# Altium PCB PCB1.PcbDoc (part 1 of 2)
Units mm, origin at the board's own origin, x right, y up, seen from the top; angles counter-clockwise.
Board outline 53 x 53 mm, 4 copper layers (Top Layer, Internal Plane 1, Signal Layer 1, Bottom Layer), stack 1.58 mm thick; 86 components, 52 nets, 310 pads, 1237 vias.
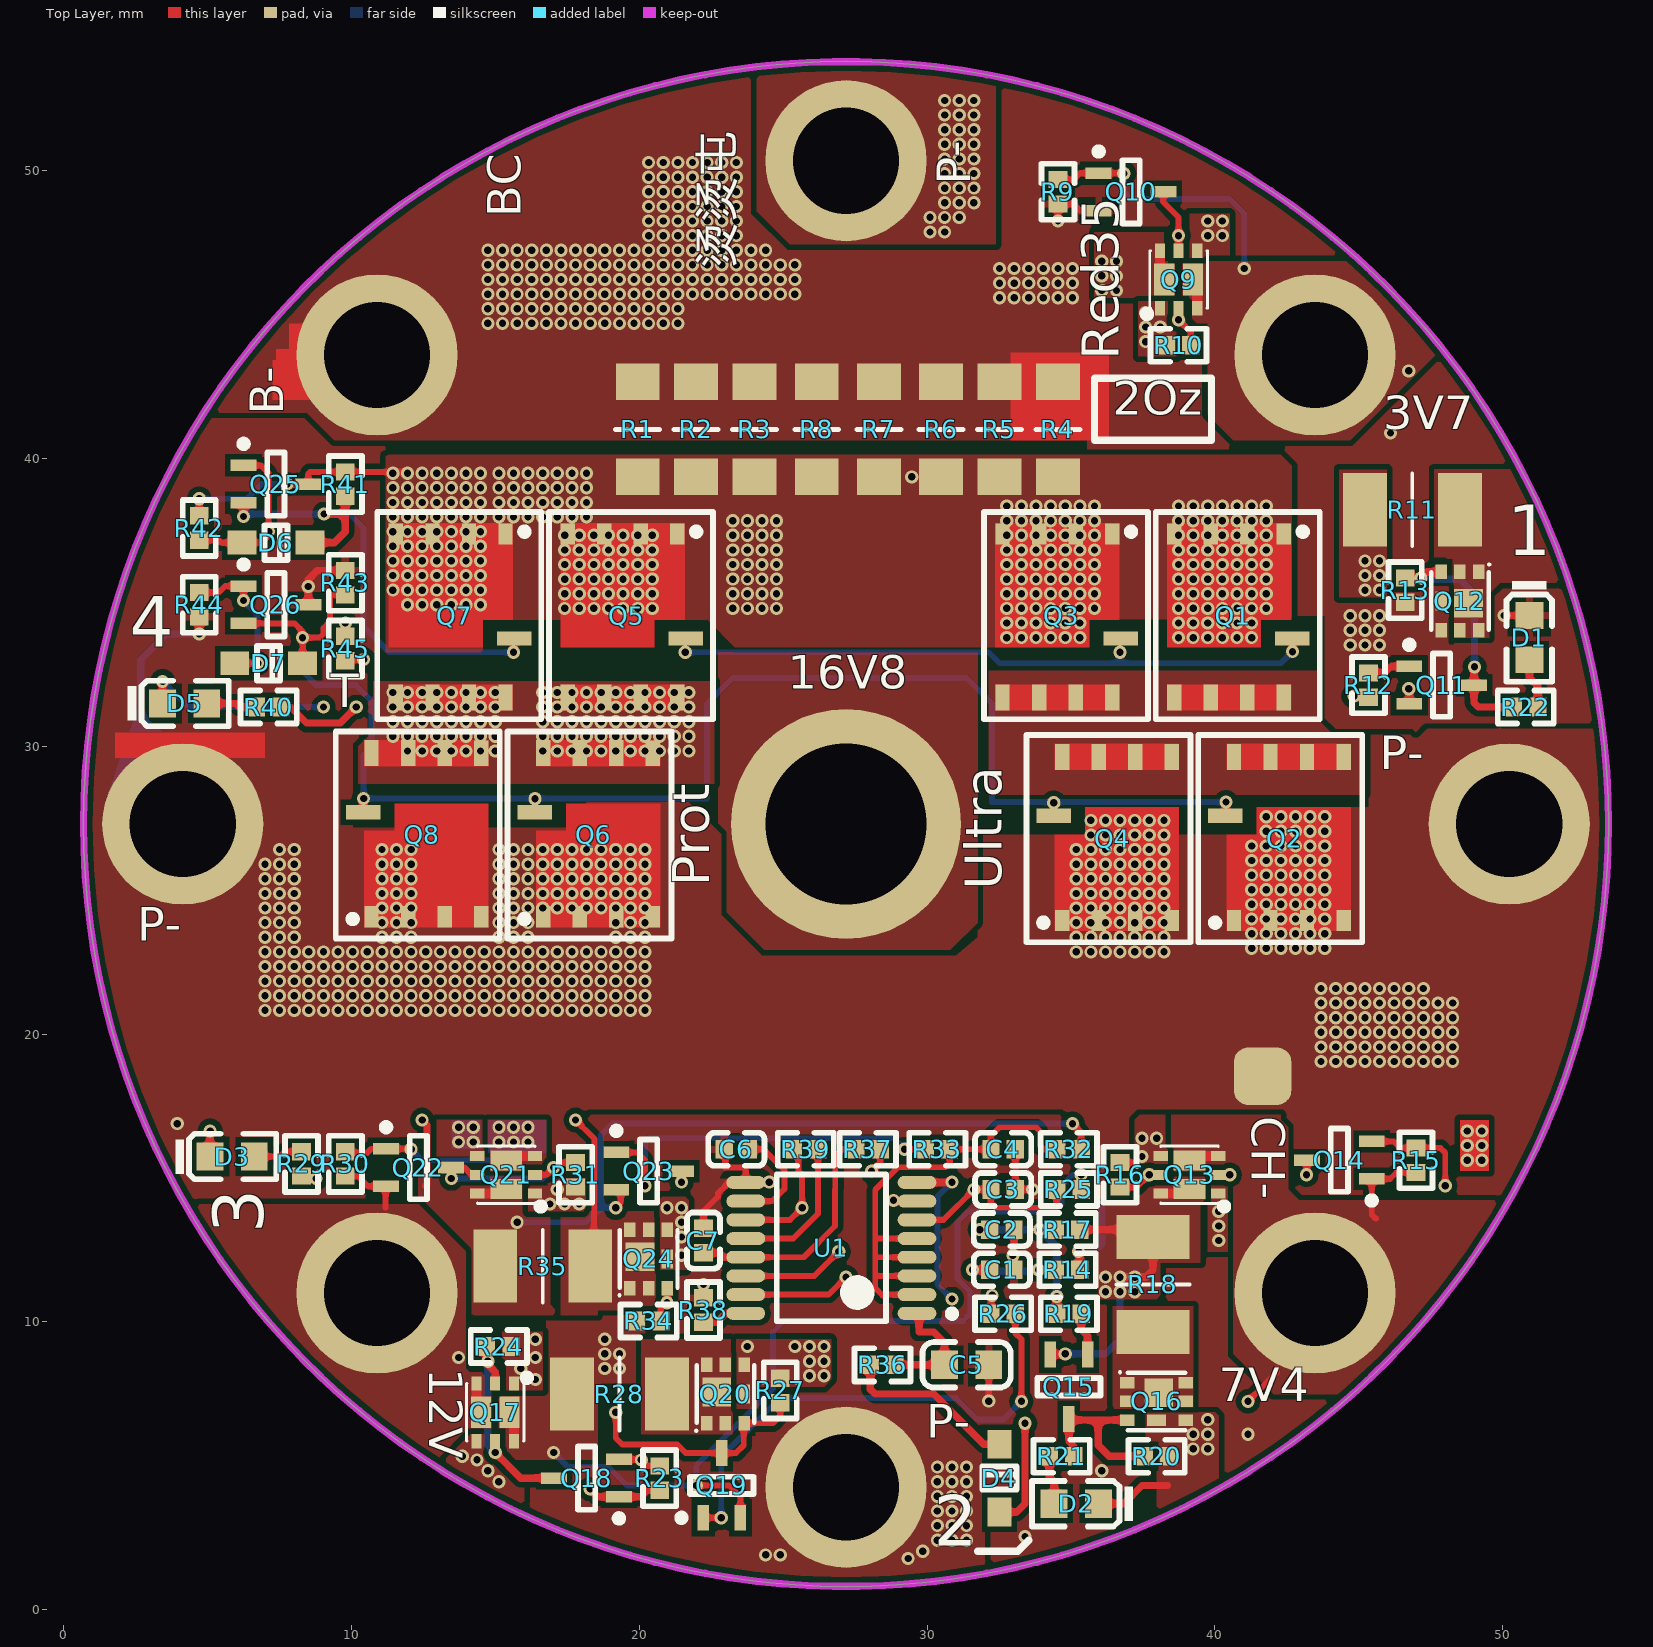
[diagram p0: Top Layer view]
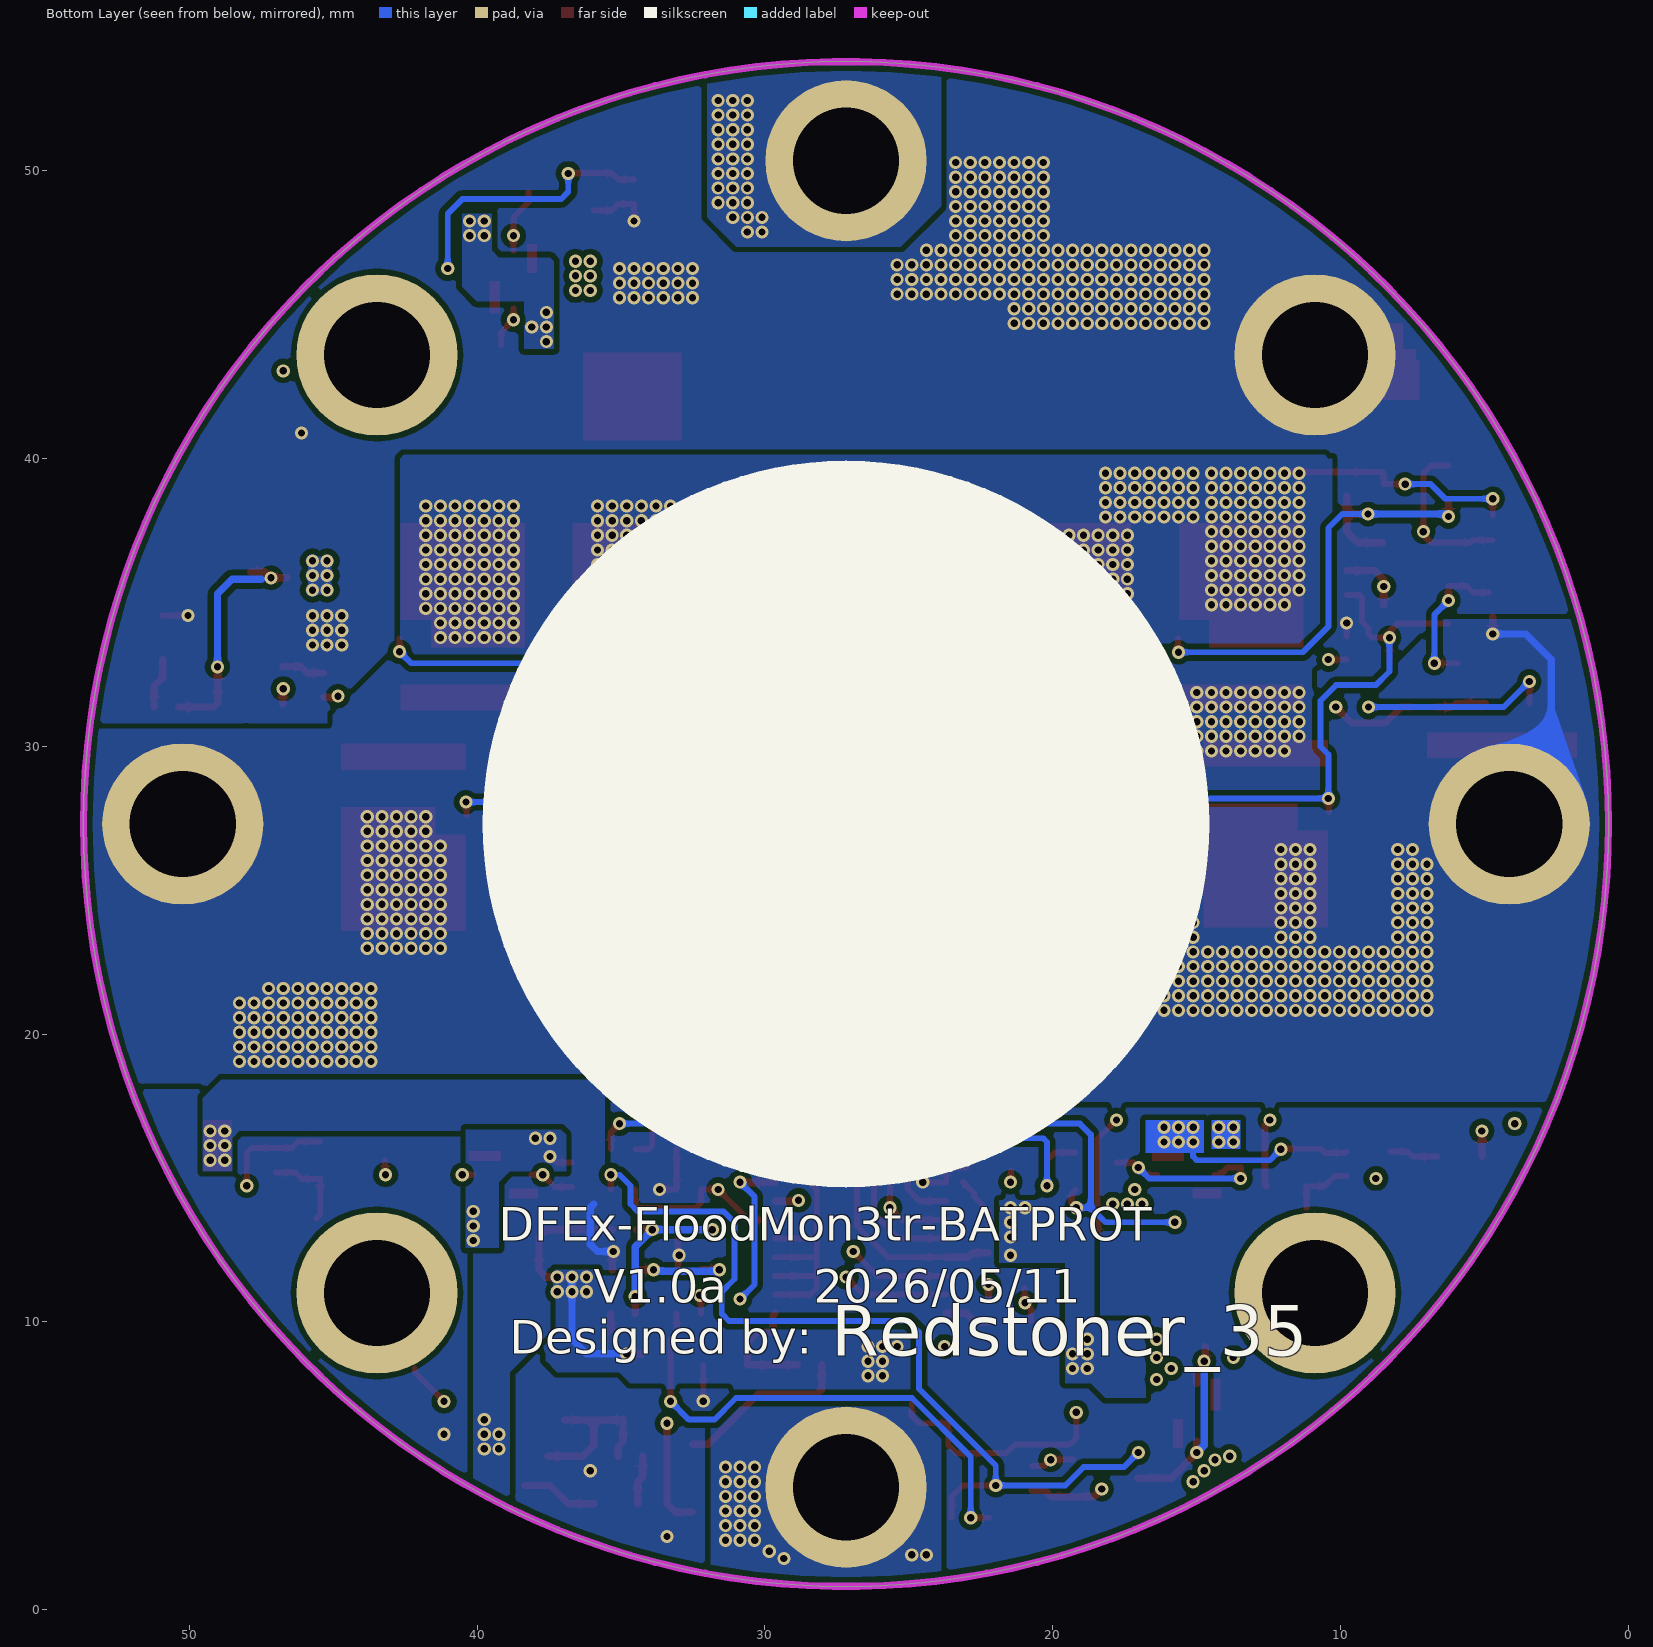
[diagram p1: Bottom Layer view, seen from below]
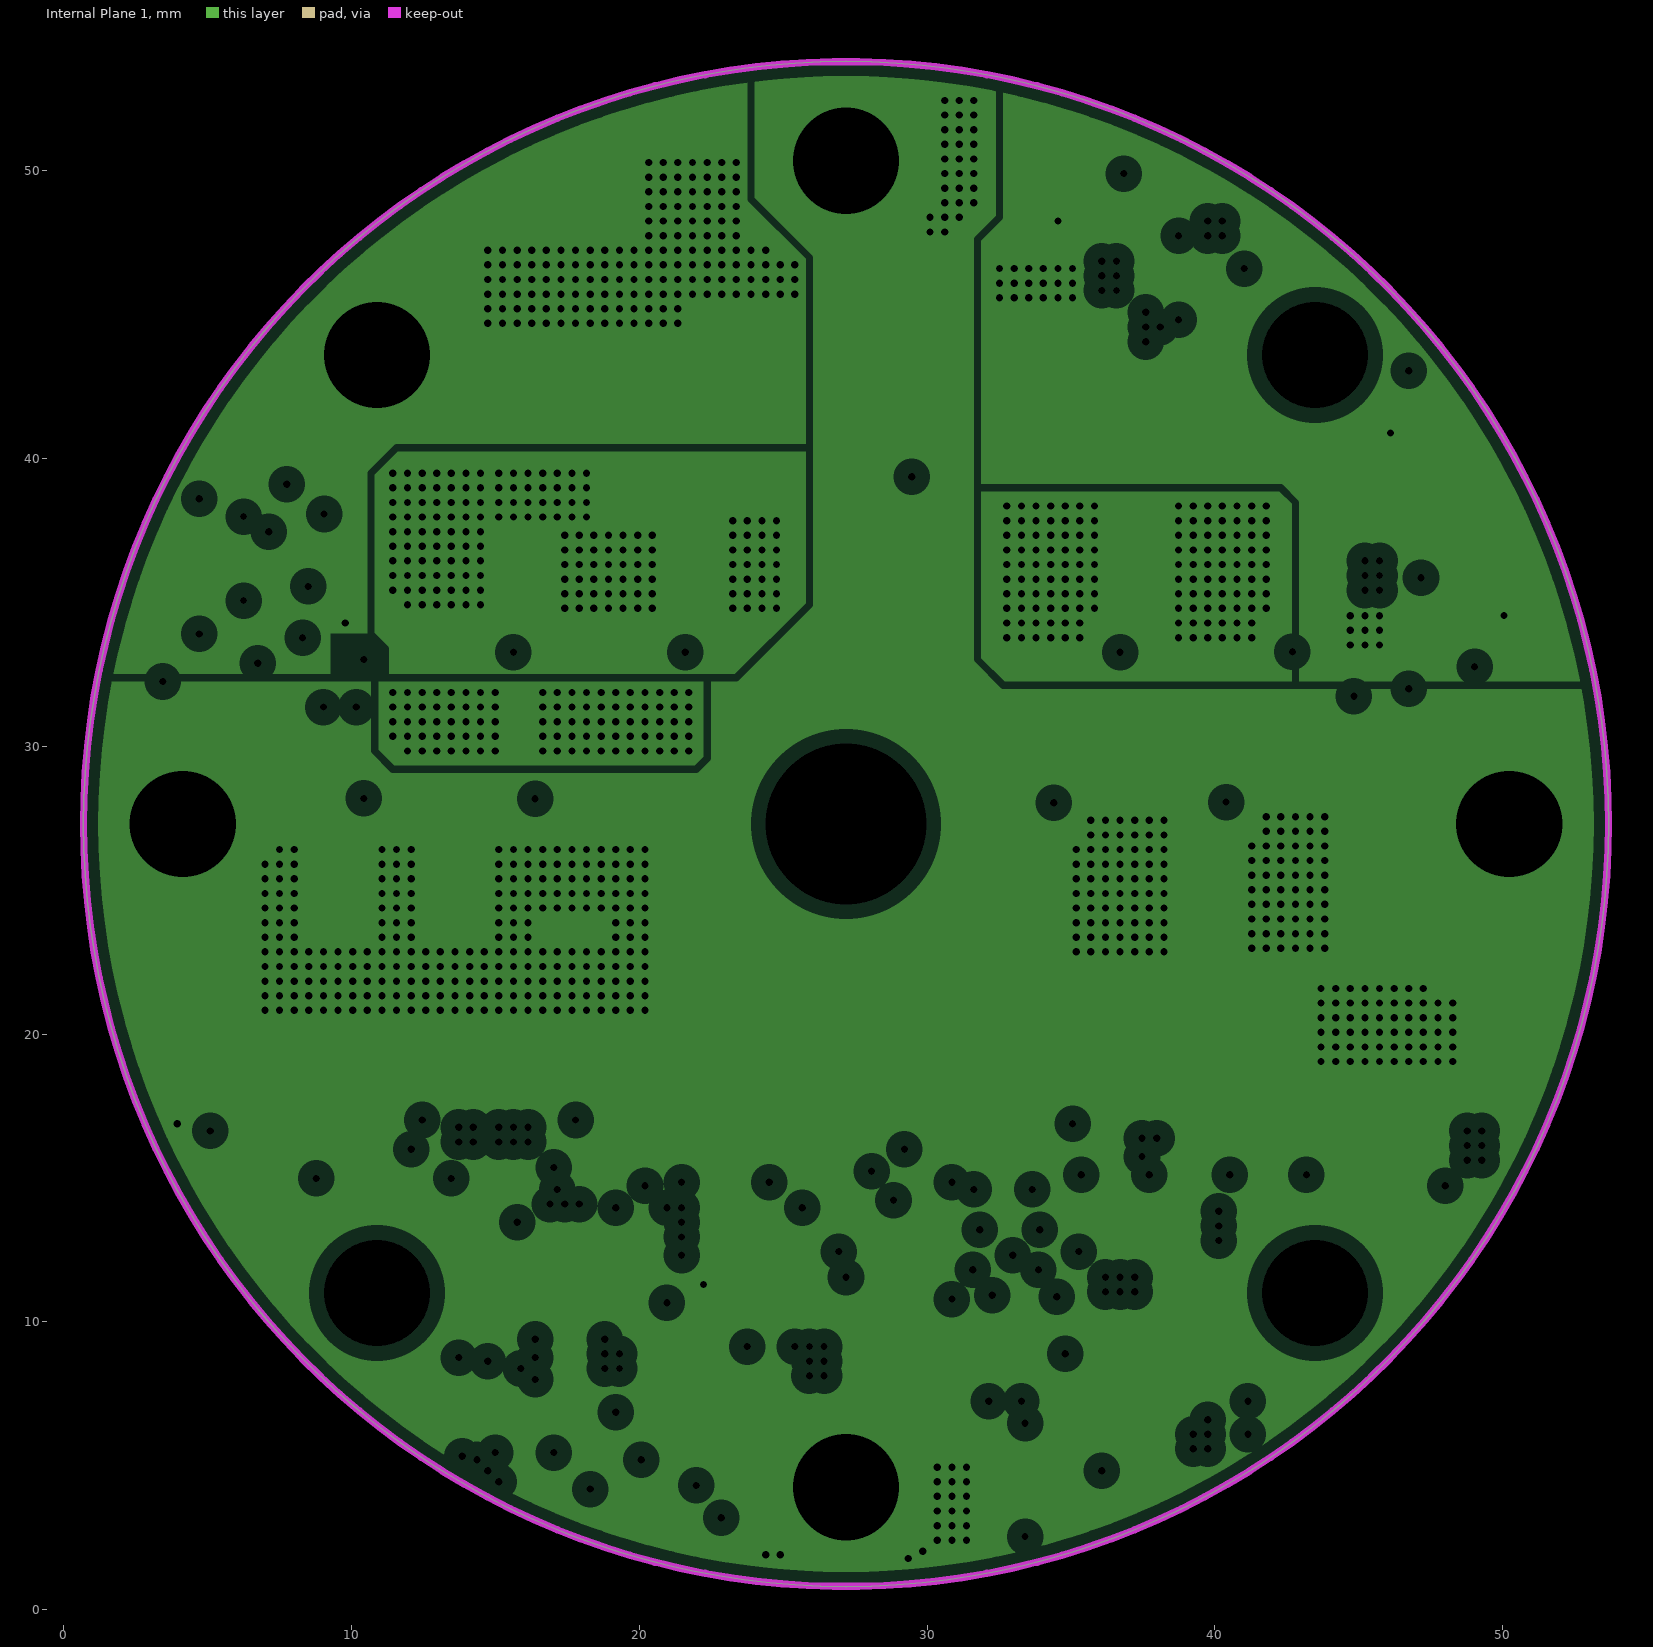
[diagram p2: Internal Plane 1, clearances drawn from the general rule]
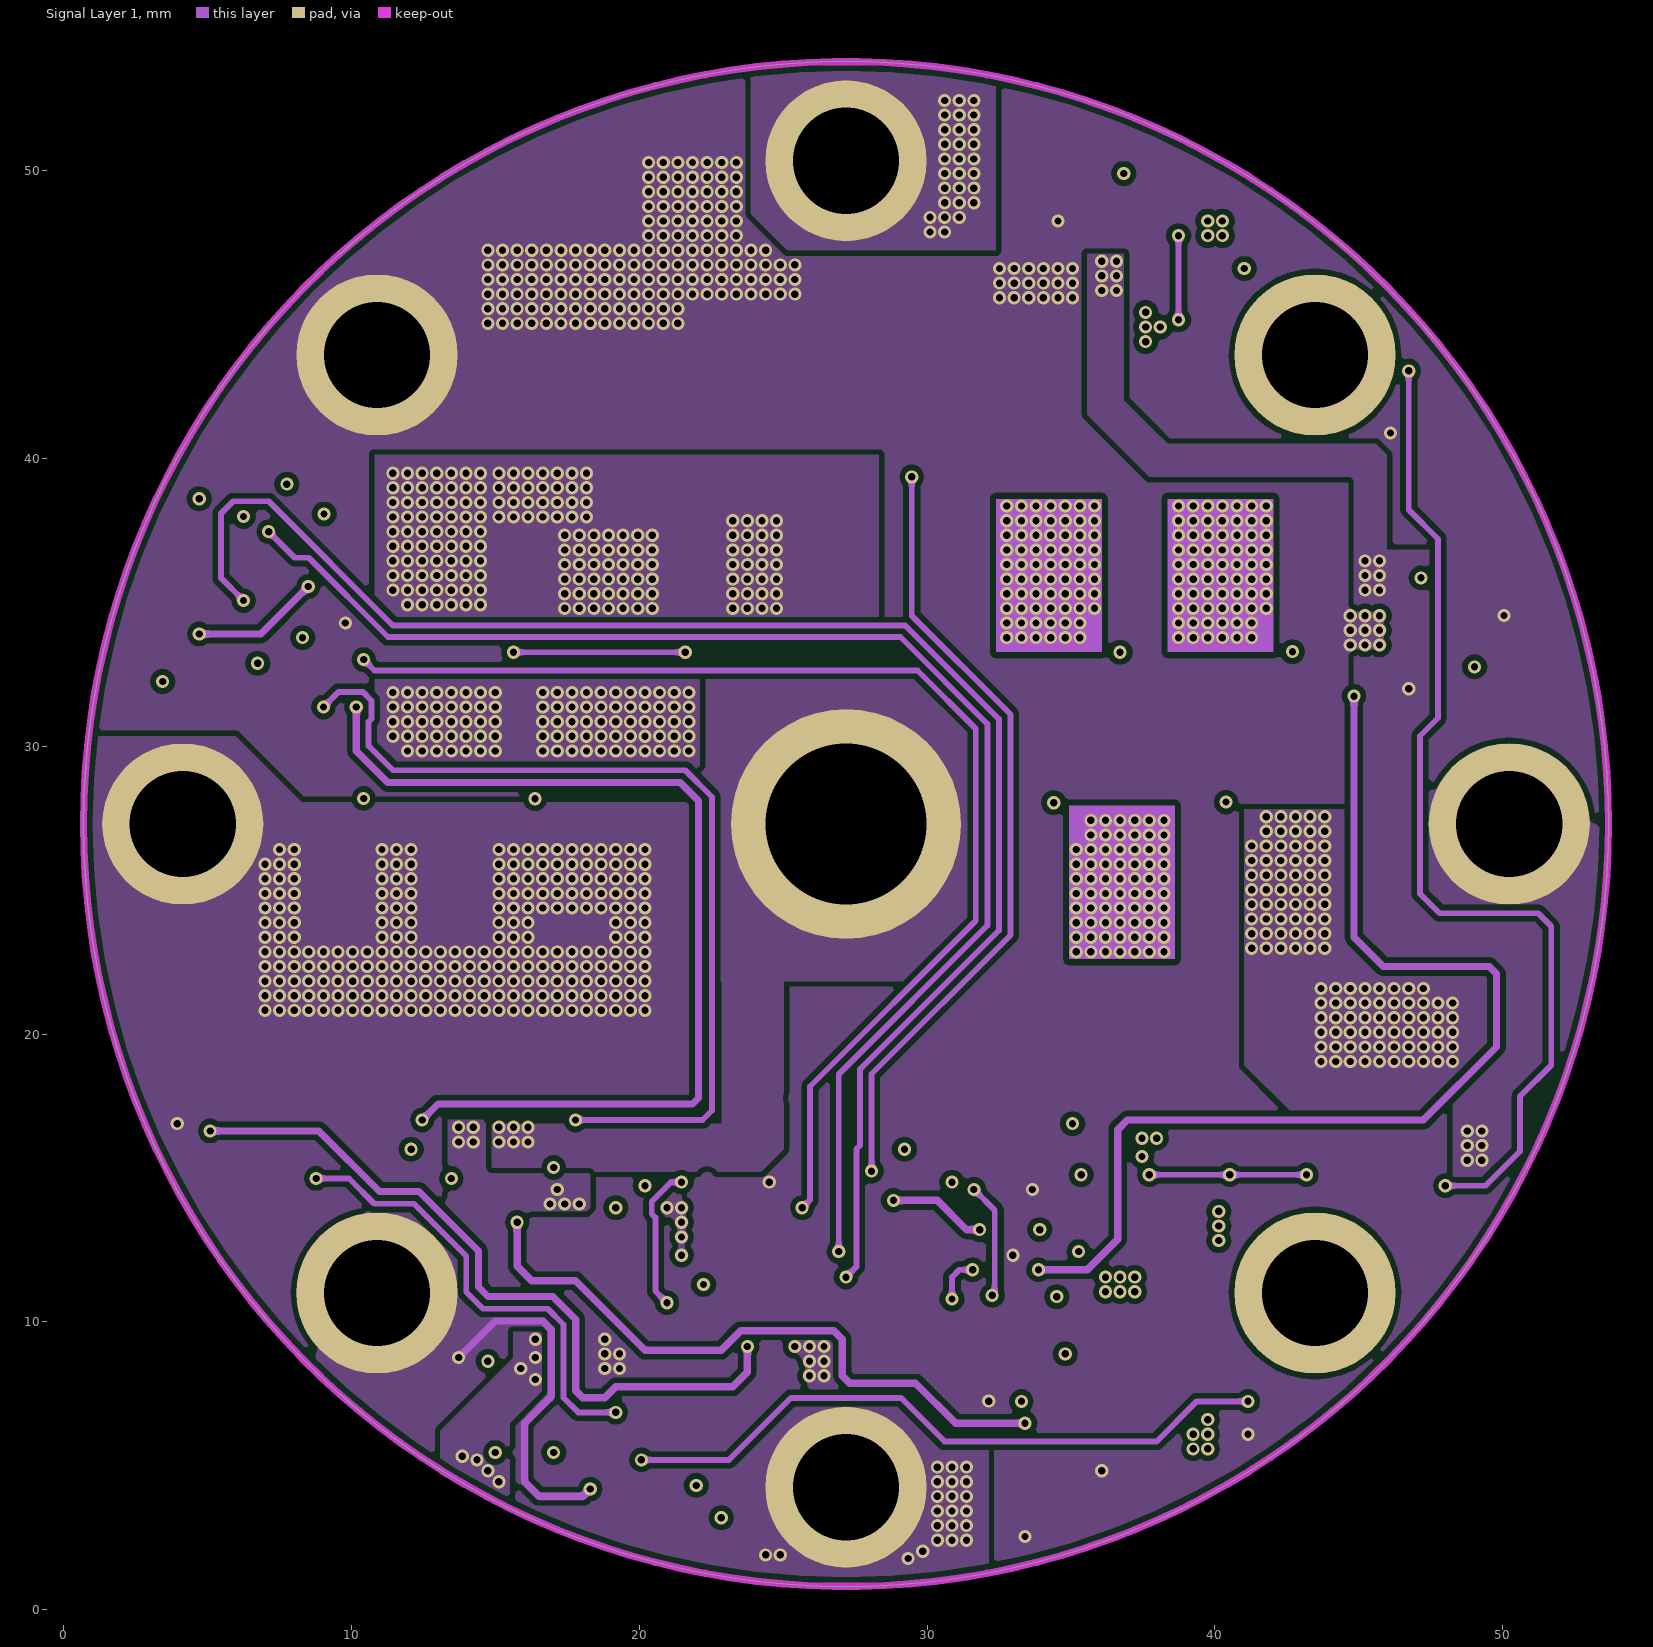
[diagram p3: Signal Layer 1]
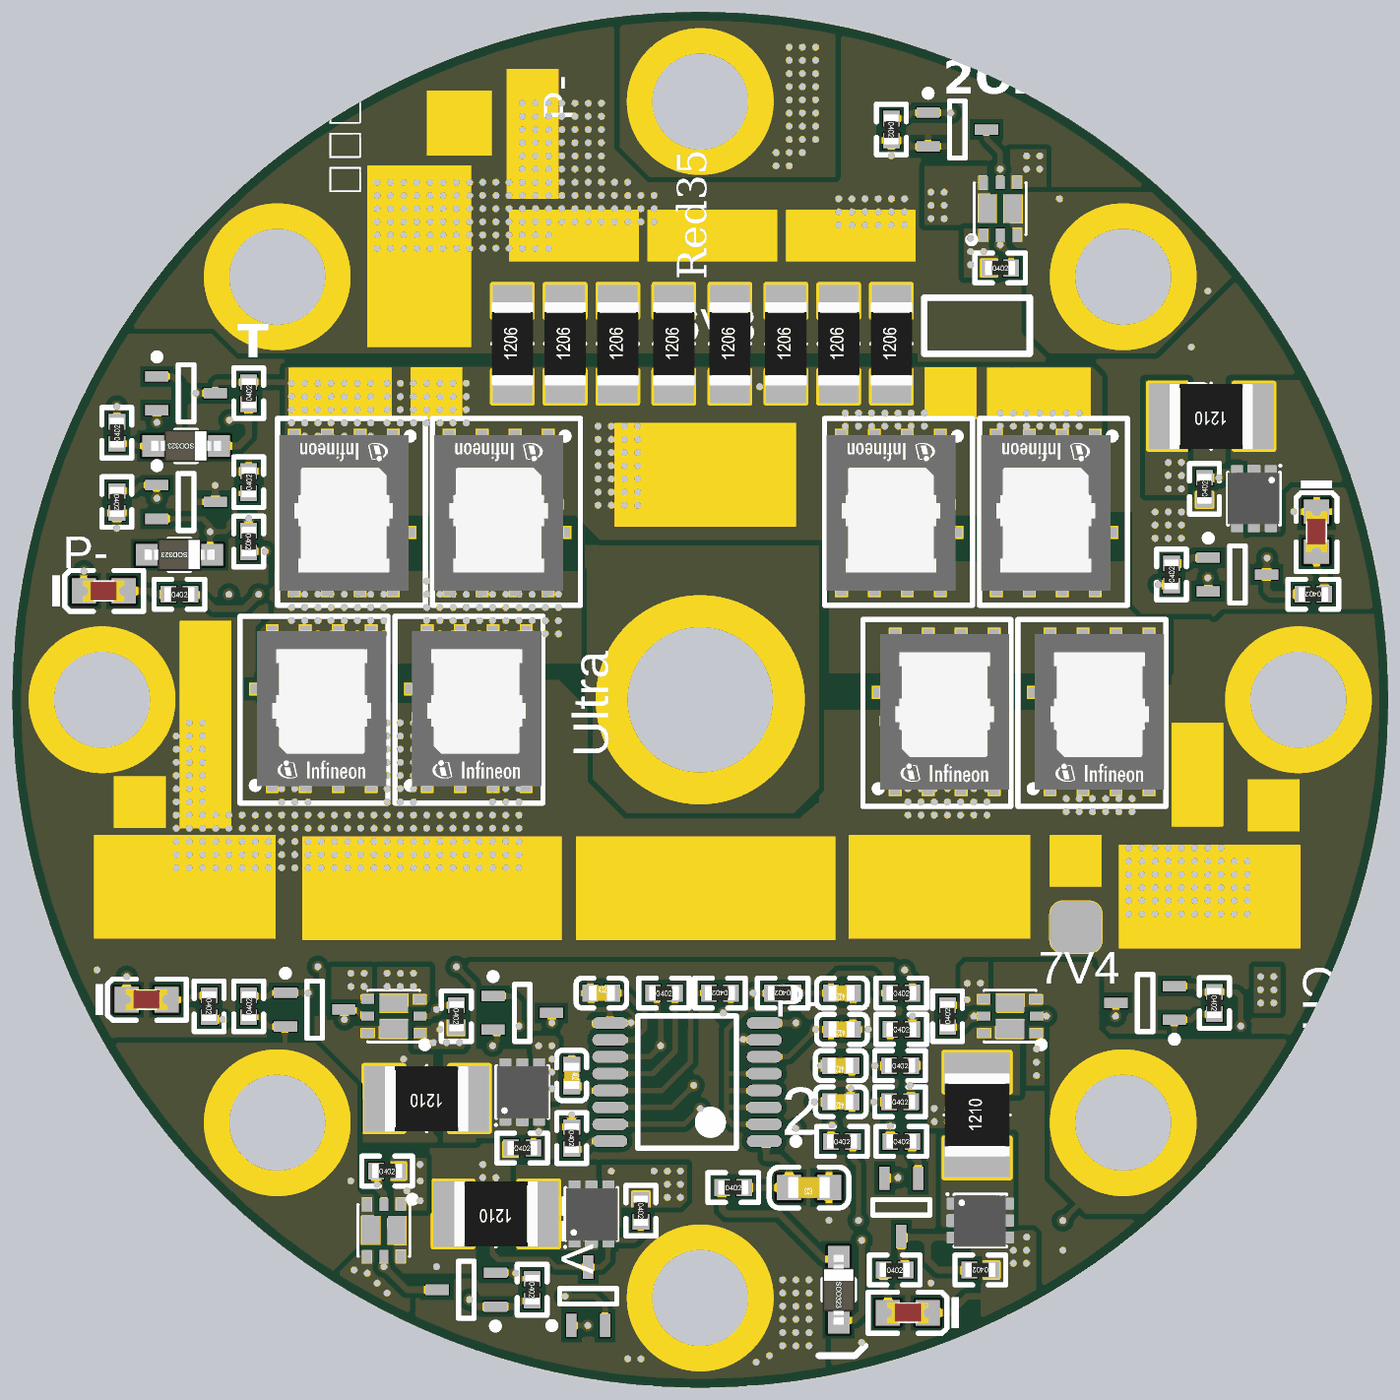
[diagram p5: 3D render of the assembled board from above, using the file's embedded part models]

## Layer stack, top to bottom
Top Solder: solder mask 0.0102, Solder Resist, Dk 3.5
Top Layer: signal copper 0.0356
Dielectric 1: core 0.656, FR-4, Dk 4.2
Internal Plane 1: plane copper 0.036
Dielectric 3: prepreg 0.127, Dk 4.2
Signal Layer 1: signal copper 0.036
Dielectric 2: core 0.654, Dk 4.2
Bottom Layer: signal copper 0.0356
Bottom Solder: solder mask 0.0102, Solder Resist, Dk 3.5

## Board outline
0.678,27.305 ccw(c27.178,27.305) 27.178,0.805 ccw(c27.178,27.305) 53.678,27.305 ccw(c27.178,27.305) 27.178,53.805 ccw(c27.178,27.305)

## Design rules (kind name [scope] priority, off if disabled: settings)
Clearance [All] p1: gap=0.198
PlaneClearance [All] p1: clearance=0.508
PlaneConnect [All] p1: planeconnectstyle=Direct reliefexpansion=0.508 reliefentries=4 reliefconductorwidth=0.254 reliefairgap=0.254
PolygonConnect PolygonConnect_1 [IsVia] p1: connectstyle=Direct reliefconductorwidth=0.254 reliefentries=4 polygonreliefangle="90 Angle" airgapwidth=0.254
PolygonConnect [All] p2: connectstyle=Direct reliefconductorwidth=0.254 reliefentries=4 polygonreliefangle="90 Angle" airgapwidth=0.254
RoomDefinition main [InComponentClass('main')] p1: confinementstyle=ConfineIn formatcopy=TRUE lockcomponents=FALSE outline 55.372,-0.762 129.286,-0.762 129.286,7.874 55.372,7.874
RoutingVias [All] p1: holewidth=0.711 width=1.27 viastyle="Through Hole" minholewidth=0.711 minwidth=1.27 maxholewidth=0.711 maxwidth=1.27
SolderMaskExpansion [All] p1: expansion=0.102
Width [All] p1: maxlimit=25.4 minlimit=0.178 preferedwidth=0.254
28 further rules are at their usual default settings.

## Components (designator, comment, footprint, x,y, rotation, side; value= is the part's Value field where it differs from the comment)
C1 "100nF (104) 10% 50V" 0402_C 32.595,11.811 r180 top
C2 "100nF (104) 10% 50V" 0402_C 32.595,13.208 r180 top
C3 "100nF (104) 10% 50V" 0402_C 32.639,14.605 r180 top
C4 "100nF (104) 10% 50V" 0402_C 32.639,16.002 r180 top
C5 "GRM188R61E106KA73D" 0603_C 31.369,8.509 r180 top
C6 "33nF (333) 10% 50V" 0402_C 23.368,16.002 r0 top
C7 "100nF (104) 10% 50V" 0402_C 22.225,12.827 r270 top
D1 "白灯 0603" 0603_LED_S1 50.927,33.782 r270 top
D2 "白灯 0603" 0603_LED_S1 35.179,3.683 r180 top
D3 "白灯 0603" 0603_LED_S1 5.842,15.748 r0 top
D4 "B5819WS S4" SOD-323 32.512,4.572 r270 top
D5 "白灯 0603" 0603_LED_S1 4.191,31.496 r0 top
D6 "B5819WS S4" SOD-323 7.366,37.084 r180 top
D7 "B5819WS S4" SOD-323 7.112,32.893 r180 top
Q1 "IQDH29NE2LM5CG" IFX-PG-WHTFN-9-2-V 40.64,34.544 r270 top
Q2 "IQDH29NE2LM5CG" IFX-PG-WHTFN-9-2-V 42.418,26.797 r90 top
Q3 "IQDH29NE2LM5CG" IFX-PG-WHTFN-9-2-V 34.671,34.544 r270 top
Q4 "IQDH29NE2LM5CG" IFX-PG-WHTFN-9-2-V 36.449,26.797 r90 top
Q5 "IQDH29NE2LM5CG" IFX-PG-WHTFN-9-2-V 19.558,34.544 r270 top
Q6 "IQDH29NE2LM5CG" IFX-PG-WHTFN-9-2-V 18.415,26.924 r90 top
Q7 "IQDH29NE2LM5CG" IFX-PG-WHTFN-9-2-V 13.589,34.544 r270 top
Q8 "IQDH29NE2LM5CG" IFX-PG-WHTFN-9-2-V 12.446,26.924 r90 top
Q9 "WSD4280DN22" UDFN-6_L2.0-W2.0-P0.65-BL_NTLUD3A50PZ 38.735,46.228 r0 top
Q10 "2N7002KW" SC70-3 37.084,49.276 r0 top
Q11 "SS8550 Y2" SC70-3 47.879,32.131 r0 top
Q12 "AON2408" PDFN-6_L2.0-W2.0-P0.65-BL-EP 48.514,35.052 r180 top
Q13 "WSD4280DN22" UDFN-6_L2.0-W2.0-P0.65-BL_NTLUD3A50PZ 39.116,15.113 r90 top
Q14 "2N7002KW" SC70-3 44.323,15.621 r180 top
Q15 "SS8550 Y2" SC70-3 34.925,7.747 r270 top locked
Q16 "AON2408" PDFN-6_L2.0-W2.0-P0.65-BL-EP 37.973,7.239 r270 top
Q17 "WSD4280DN22" UDFN-6_L2.0-W2.0-P0.65-BL_NTLUD3A50PZ 14.986,6.858 r180 top
Q18 "2N7002KW" SC70-3 18.161,4.572 r180 top
Q19 "SS8550 Y2" SC70-3 22.86,4.318 r90 top
Q20 "AON2408" PDFN-6_L2.0-W2.0-P0.65-BL-EP 22.987,7.493 r0 top
Q21 "WSD4280DN22" UDFN-6_L2.0-W2.0-P0.65-BL_NTLUD3A50PZ 15.367,15.113 r90 top
Q22 "2N7002KW" SC70-3 12.319,15.367 r0 top
Q23 "SS8550 Y2" SC70-3 20.32,15.24 r0 top
Q24 "AON2408" PDFN-6_L2.0-W2.0-P0.65-BL-EP 20.32,12.192 r0 top
Q25 "BSS84AKW" SC70-3 7.366,39.116 r0 top
Q26 "BSS84AKW" SC70-3 7.366,34.925 r0 top
R1 "JER1206F1R004" 1206R 19.939,41.021 r90 top
R2 "JER1206F1R004" 1206R 21.971,41.021 r90 top
R3 "JER1206F1R003" 1206R 24.003,41.021 r90 top
R4 "JER1206F1R003" 1206R 34.544,41.021 r90 top
R5 "JER1206F1R003" 1206R 32.512,41.021 r90 top
R6 "JER1206F1R003" 1206R 30.48,41.021 r90 top
R7 "1206 2.5mΩ ±1% 1W" 1206R 28.321,41.021 r90 top
R8 "1206 2.5mΩ ±1% 1W" 1206R 26.162,41.021 r90 top
R9 "510KΩ (5103) ±1%" 0402_R 34.544,49.276 r270 top
R10 "510KΩ (5103) ±1%" 0402_R 38.735,43.942 r0 top
R11 "43Ω" 1210R 46.863,38.227 r180 top
R12 "220Ω (2200) ±1%" 0402_R 45.339,32.131 r90 top
R13 "680Ω (6800) ±1%" 0402_R 46.609,35.433 r90 top
R14 "1KΩ (1001) ±1%" 0402_R 34.881,11.811 r0 top
R15 "510KΩ (5103) ±1%" 0402_R 46.99,15.621 r270 top
R16 "510KΩ (5103) ±1%" 0402_R 36.703,15.113 r90 top
R17 "1KΩ (1001) ±1%" 0402_R 34.881,13.208 r0 top
R18 "43Ω" 1210R 37.846,11.303 r90 top
R19 "220Ω (2200) ±1%" 0402_R 34.925,10.287 r0 top
R20 "680Ω (6800) ±1%" 0402_R 37.973,5.334 r180 top
R21 "2KΩ (2001) ±1%" 0402_R 34.671,5.334 r0 top
R22 "2KΩ (2001) ±1%" 0402_R 50.8,31.369 r180 top
R23 "510KΩ (5103) ±1%" 0402_R 20.701,4.572 r270 top
R24 "510KΩ (5103) ±1%" 0402_R 15.113,9.144 r0 top
R25 "1KΩ (1001) ±1%" 0402_R 34.925,14.605 r0 top
R26 "220Ω (2200) ±1%" 0402_R 32.639,10.287 r0 top
R27 "680Ω (6800) ±1%" 0402_R 24.892,7.62 r270 top
R28 "43Ω" 1210R 19.304,7.493 r180 top
R29 "2KΩ (2001) ±1%" 0402_R 8.255,15.494 r270 top
R30 "510KΩ (5103) ±1%" 0402_R 9.779,15.494 r90 top
R31 "510KΩ (5103) ±1%" 0402_R 17.78,15.113 r270 top
R32 "1KΩ (1001) ±1%" 0402_R 34.925,16.002 r0 top
R33 "220Ω (2200) ±1%" 0402_R 30.353,16.002 r180 top
R34 "680Ω (6800) ±1%" 0402_R 20.32,10.033 r0 top
R35 "43Ω" 1210R 16.637,11.938 r180 top
R36 "1KΩ (1001) ±1%" 0402_R 28.448,8.509 r0 top
R37 "2KΩ (2001) ±1%" 0402_R 27.94,16.002 r180 top
R38 "20KΩ (2002) ±1%" 0402_R 22.225,10.414 r270 top
R39 "91KΩ (9103) ±1%" 0402_R 25.781,16.002 r0 top
R40 "2KΩ (2001) ±1%" 0402_R 7.112,31.369 r0 top
R41 "5.6MΩ (5604) ±1%" 0402_R 9.779,39.116 r90 top
R42 "5.6MΩ (5604) ±1%" 0402_R 4.699,37.592 r90 top
R43 "5.6MΩ (5604) ±1%" 0402_R 9.779,35.687 r90 top
R44 "5.6MΩ (5604) ±1%" 0402_R 4.699,34.925 r270 top
R45 "SDNT1005X104F3950FTF" 0402_R 9.779,33.401 r270 top
U1 "CM1341-FKT" TSSOP16-CM1341 26.67,12.573 r180 top locked

## Footprints (in the part's own frame and the unit in brackets; to place one, negate y for a bottom-side part, rotate by r counter-clockwise, add the part's x,y. Pads: shape width x height; smd on the part's side, far side on the other; paste and mask are expansions set on the pad)
0402_C [mm]
  rect 0.6x0.65 smd mask+0.051: 1(-0.425,0) 2(0.425,0)
  silkscreen extent -0.97,-0.58 0.97,0.58, body extent -0.48,-0.3 0.52,0.3, height 0.2
0402_R [mm]
  rect 0.6x0.65 smd mask+0.051: 1(-0.425,0) 2(0.425,0)
  silkscreen extent -0.97,-0.58 0.97,0.58, body extent -0.57,-0.27 0.58,0.28, height 0.41
0603_C [mm]
  rect 0.93x0.98 smd: 1(-0.77,0) 2(0.77,0)
  silkscreen extent -1.53,-0.79 1.54,0.79, body extent -0.8,-0.4 0.8,0.4, height 0.3
0603_LED_S1 [mm]
  rect 0.93x0.98 smd: A(0.77,0) K(-0.77,0)
  silkscreen extent -1.98,-0.79 1.54,0.79, body extent -0.8,-0.4 0.8,0.4, height 0.6
1206R [mil]
  rect 50x60 smd: 1(-65,0) 2(65,0)
  silkscreen extent 0,-30 0,30, body extent -63,-31 63,31, height 24
1210R [mil]
  rect 60x100 smd: 1(-65,0) 2(65,0)
  silkscreen extent 0,-50 0,50, body extent -63,-49 63,49, height 24
IFX-PG-WHTFN-9-2-V [mm] "PG-WHTFN-9-2, SMD, 1.27 mm pitch, 9 pin, 6.00 mm L X 5.00 W mm X 0.75 mm H body"
  rect 0.732x0.5 smd paste-0.25 mask-0.25: 1(-2.842,1.757) 2(-2.842,0.487) 3(-2.842,-0.783) 4(-2.842,-2.053)
  rect 0.9x0.5 smd paste-0.25 mask-0.25: 5(2.842,-2.053) 6(2.842,-0.783) 7(2.842,0.487) 8(2.842,1.757)
  rect 0.5x1.2 smd paste-0.05 mask+0: 9(0.792,2.053)
  Top Layer region: 1.092,-2.302 -3.208,-2.302 -3.208,-1.802 -3.208,-1.032 -3.208,-0.532 -3.208,0.238 -3.208,0.738 -3.208,1.508 -3.208,2.008 0.142,2.008 0.142,0.958 1.092,0.958
  Top Layer region: 3.292,2.008 3.292,-2.302 2.392,-2.302 2.392,2.008 3.292,2.008
  silkscreen extent -3.6,-2.7 3.6,3, body extent -2.96,-2.65 3.04,2.35, height 0.75
PDFN-6_L2.0-W2.0-P0.65-BL-EP [mm]
  rect 0.4x0.5 smd paste+0.03 mask+0.03: D(-0.65,1.016) D(-0.65,-1.016) D(0,1.016) G(0.65,-1.016) S(0.65,1.016)
  rect 1x1 smd paste+0.051 mask+0.03: D(-0.302,0.073)
  rect 0.4x0.5 smd paste+0.051 mask+0.03: D(0,-1.016)
  rect 0.4x0.66 smd paste+0.051 mask+0.03: S(0.65,0)
  silkscreen extent -1.02,-1.27 1,1, body extent -0.98,-1.02 1.02,0.98, height 0.6
SC70-3 [mm] "3 Lead SC70(SOT-323) package for small Transistor"
  rect 0.9x0.4 smd mask+0.05: 1(-1.125,0.65) 2(-1.125,-0.65) 3(1.125,0)
  silkscreen extent -1.25,-1.1 0.3,1.52, body extent -0.67,-1.1 0.67,1.1, height 1.1
SOD-323 [mm]
  rect 1x0.83 smd: 1(1.18,0) 2(-1.18,0)
  silkscreen extent -0.4,-0.6 0.4,0.6, body extent -1.35,-0.62 1.35,0.63, height 1.1
TSSOP16-CM1341 [mm] "TSOP, 16-Leads, Body 5.00x4.40mm, Pitch 0.65mm, IPC Medium Density"
  oval 1.35x0.45 smd mask+0.03: 1(-2.975,2.275) 2(-2.975,1.625) 3(-2.975,0.975) 4(-2.975,0.325) 5(-2.975,-0.325) 6(-2.975,-0.975) 7(-2.975,-1.625) 8(-2.975,-2.275) 9(2.975,-2.275) 10(2.975,-1.625) 11(2.975,-0.975) 12(2.975,-0.325) 13(2.975,0.325) 14(2.975,0.975) 15(2.975,1.625) 16(2.975,2.275)
  silkscreen extent -4.32,-2.55 1.9,2.55, body extent -2.3,-2.55 2.3,2.55, height 1.2
UDFN-6_L2.0-W2.0-P0.65-BL_NTLUD3A50PZ [mm]
  rect 0.35x0.495 smd mask+0.03: 1(-0.65,-1.001) 2(0,-1.001) 3(0.65,-1.001) 4(0.65,1.001) 5(0,1.001) 6(-0.65,1.001)
  rect 0.7x1.1 smd mask+0.03: 3(0.498,0) 6(-0.498,0)
  Top Layer region: 0.475,-1.174 0.826,-1.174 0.826,-0.06 0.475,-0.06
  Top Layer region: -0.826,0.226 -0.476,0.226 -0.476,1.239 -0.826,1.239
  silkscreen extent -1.22,-1.32 1,1, body extent -1.02,-1.02 1.02,1.02, height 0.55

## Part data
C1 C2 C3 C4: library part "0402 220nF (224) 10% 16V", "贴片电容"
C5: library part "0603 10uF (106) 10% 10V", "0603贴片MLCC电容 10uF ±20% 25V X5R"
C6 C7: library part "0402 100nF (104) 10% 16V", "贴片电容"
D1 D2 D3 D5: library part "0603 白灯", "发光二极管"
D4 D6 D7: library part "SOD-323 1N4148WS T4", "二极管"
Q1 Q2 Q3 Q4 Q5 Q6 Q7 Q8: library part IQDH29NE2LM5CGSC, "英飞凌MOSFET 25V 789A 0.2mΩ @ 10V WHTFN-9(PDFN5x6源极底置)封装"
Q9 Q13 Q17 Q21: library part NTLUD3A50PZ, "内置肖特基二极管的双P沟道MOS -15V -4.6A 45mΩ @ 4.5V DFN2x2封装"
Q10 Q14 Q18 Q22: library part "2N7002 7002", "单N沟道MOSFET(场效应管)"
Q11 Q15 Q19 Q23: library part "SOT-23 SS8550 Y2", "PNP三极管，SOT-323 封装"
Q12 Q16 Q20 Q24: library part "AO3400A N道沟 X0YV1T SOT-23", "MOS(场效应管)"
Q25 Q26: library part SI2301CDS-T1-GE3, "单P沟道小信号MOSFET(场效应管)"
R1 R2: library part Res, "贴片合金电流检测电阻 1206封装 4mΩ ±1% 1W"
R3 R4 R5 R6: library part Res, "贴片合金电流检测电阻 1206封装 3mΩ ±1% 1W"
R7 R8: library part Res, "贴片合金检流电阻 1206 2.5mΩ ±1% 1W"
R9 R10 R15 R16 R23 R24 R30 R31: library part "0402 510KΩ (5103) 1%", "贴片电阻"
R11 R18 R28 R35: library part Res, "Resistor"
R12 R19 R26 R33: library part "0402 220Ω (2200) 1%", "贴片电阻"
R13 R20 R21 R22 R27 R29 R34 R37 R40: library part "0402 2KΩ (2001) 1%", "贴片电阻"
R14 R17 R25 R32 R36: library part "0402 1KΩ (1001) 1%", "贴片电阻"
R38: library part "0402 20KΩ (2002) 1%", "贴片电阻"
R39: library part "0402 100KΩ (1003) 1%", "贴片电阻"
R41 R42 R43 R44: library part "0402 1MΩ (1004) 1%", "贴片电阻"
R45: library part "0402 100KΩ (1003) 1%", "100KΩ (1003) ±1% B3950 NTC片式贴片热敏电阻"
U1: "4串三元锂电池带均衡功能保护IC，SSOP16封装。"

## Free pads (board coordinates)
  round 8 hole 5.6 mask+0.03: 0(27.178,27.305)
  round 5.6 hole 3.7 mask+0.03: 1(4.128,27.305) 1(10.879,11.006) 1(10.879,43.604) 1(27.178,4.255) 1(27.178,50.355) 1(43.477,11.006) 1(43.477,43.604) 1(50.228,27.305)
  rrect50% 2x2 smd mask+0.03: 2(41.656,18.542)

## Via types
v1: diameter 0.457, hole 0.254, Top Layer to Bottom Layer, tented both sides, 1237 vias

## Nets (pads, with @x,y where several pads share a name; then routed paths per layer and width w, separated by ;. In a path a pad name is that pad's centre, name@x,y a point inside that pad or via, vN(x,y) a via of type N, cw(c..) or ccw(c..) an arc to the next point about the centre after c; other vN are vias at no path point)
3V7: D2.K Q9.6 Q11.2 Q16.S R11.2 R14.2 R20.1 | length 6.2
  Top Layer w0.254: v1(35.262,12.446) 35.306,12.402 R14.2@35.306,11.811 ; D2.K@35.949,3.683 36.83,3.683 37.465,4.318 38.354,4.318 ; v1(46.736,32.004) 46.754,31.986 Q11.2@46.754,31.481
  Bottom Layer w0.254: v1(35.262,12.446) 35.814,12.446 36.068,12.7 36.068,13.97 35.941,14.097
  other v1: 39.243,5.588 39.751,5.588 39.243,6.096 39.751,6.096 39.751,6.604 48.768,15.621 49.276,15.621 48.768,16.129 49.276,16.129 48.768,16.637 49.276,16.637 45.212,35.433 45.72,35.433 45.212,35.941 45.72,35.941 45.212,36.449 45.72,36.449 36.068,45.847 36.576,45.847 36.068,46.355 36.576,46.355 36.068,46.863 36.576,46.863
7V4: D3.K Q13.6 Q15.2 Q20.S R17.2 R18.2 R27.1 | length 36.7
  Top Layer w0.254: D3.K@5.072,15.748 5.072,16.629 v1(5.08,16.637) ; Q15.2@34.275,8.872 34.78,8.872 v1(34.798,8.89) ; R17.2@35.306,13.208 37.592,13.208 R18.2@37.846,12.954 37.846,11.811 37.592,11.557 v1(36.703,11.557)
  Signal Layer 1 w0.254: v1(5.08,16.637) 8.858,16.637 10.963,14.532 12.34,14.532 14.405,12.467 14.405,11.217 14.736,10.886 16.991,10.886 17.79,10.087 17.79,7.61 18.034,7.366 18.796,7.366 19.177,7.747 23.241,7.747 23.749,8.255 v1(23.749,9.144)
  Bottom Layer w0.254: v1(34.798,8.89) 36.195,8.89 36.703,9.398 v1(36.703,11.557)
  other v1: 25.908,8.128 26.416,8.128 25.908,8.636 26.416,8.636 25.4,9.144 25.908,9.144 26.416,9.144 36.195,11.049 36.703,11.049 37.211,11.049 36.195,11.557 37.211,11.557
12V: Q17.6 Q19.2 Q24.S R25.2 R28.2 R34.1 | length 30.6
  Top Layer w0.203: v1(21.971,4.318) 23.114,4.318 23.51,3.922 Q19.2@23.51,3.193 ; R25.2@35.35,14.605 v1(35.35,15.113)
  Bottom Layer w0.203: v1(17.018,5.461) 17.526,4.953 18.923,4.953 19.558,4.318 v1(21.971,4.318) 21.971,5.013 24.638,7.68 24.638,9.652 25.019,10.033 31.242,10.033 31.496,10.287 31.496,11.049 31.051,11.494 31.051,13.462 31.432,13.843 34.417,13.843 34.671,14.097 34.671,14.732 35.052,15.113 v1(35.35,15.113)
  other v1: 18.796,8.382 19.304,8.382 18.796,8.89 19.304,8.89 18.796,9.398 21.463,12.319 21.463,12.954 21.463,13.462 20.955,13.97 21.463,13.97
16V8: D4.1 Q21.6 Q23.2 R32.2 R35.2 R40.2 | length 90.9
  Top Layer w0.203: v1(19.177,13.97) 19.35,14.143 19.35,14.435 Q23.2@19.195,14.59 ; v1(35.052,16.891) 35.35,16.593 R32.2@35.35,16.002
  Top Layer w0.254: R40.2@7.537,31.369 7.874,31.369 8.428,30.815 9.606,30.815 v1(10.16,31.369) ; v1(12.446,17.018) 12.619,16.845 12.619,14.778 12.573,14.732 ; D4.1@32.512,3.392 33.11,3.392 33.401,3.683 v1(33.401,6.477)
  Signal Layer 1 w0.254: v1(10.16,31.369) 10.16,29.845 11.257,28.748 21.417,28.748 22.052,28.113 22.052,17.78 21.844,17.572 13,17.572 v1(12.446,17.018) ; v1(15.748,13.462) 15.748,11.938 16.256,11.43 17.78,11.43 20.193,9.017 22.839,9.017 23.52,9.698 26.751,9.698 27.051,9.398 27.051,8.128 27.305,7.874 29.591,7.874 30.988,6.477 v1(33.401,6.477)
  Bottom Layer w0.203: v1(15.748,13.462) 18.161,13.462 18.669,13.97 ; v1(19.177,13.97) 18.669,13.97 ; v1(35.052,16.891) 19.05,16.891 18.669,16.51 18.669,13.97
BALDN1: D5.K Q24.D R35.1 | length 43
  Top Layer w0.203: D5.K@3.421,31.496 3.421,32.25 v1(3.429,32.258) ; v1(17.78,17.018) 18.435,16.363 18.435,13.853 18.415,13.833 R35.1@18.415,13.081
  Signal Layer 1 w0.203: v1(9.017,31.369) 9.545,31.897 10.379,31.897 10.688,31.588 10.688,30.963 10.587,30.861 10.587,30.022 11.434,29.174 21.594,29.174 22.525,28.244 22.525,17.349 22.193,17.018 v1(17.78,17.018)
  Bottom Layer w0.203: v1(3.429,32.258) 4.318,31.369 v1(9.017,31.369)
CCTRL: D7.1 Q26.1 R44.1 U1.15 | length 64.2
  Top Layer w0.203: R44.1@4.826,35.35 5.378,35.35 5.603,35.575 Q26.1@6.241,35.575 v1(6.241,35.07) v1@6.223,35.052 ; D7.1@5.932,32.893 v1(6.731,32.893) ; U1.15@23.695,10.948 26.569,10.948 v1(27.178,11.557)
  Signal Layer 1 w0.203: v1(6.241,35.07) 5.461,35.85 5.461,38.1 5.88,38.519 7.114,38.519 11.43,34.204 29.237,34.204 32.492,30.949 32.492,23.61 27.666,18.784 27.666,16.129 27.539,16.002 27.539,11.918 v1(27.178,11.557)
  Bottom Layer w0.203: v1(6.241,35.07) 6.731,34.58 v1(6.731,32.893)
CELL1: pad.1@43.477,43.604 Q9.3 Q10.1 Q14.2 R9.1 R15.1 | length 48.5
  Top Layer w0.203: R9.1@34.544,49.701 35.096,49.701 35.321,49.926 Q10.1@35.959,49.926 36.815,49.926 v1(36.83,49.911) ; Q14.2@45.448,16.271 46.213,16.271 46.438,16.046 R15.1@46.99,16.046 47.835,16.046 48.006,15.875 v1(48.006,14.732)
  Signal Layer 1 w0.203: v1(46.736,43.053) 46.736,38.227 47.752,37.211 47.752,30.988 47.128,30.364 47.128,24.881 47.804,24.205 51.233,24.205 51.689,23.749 51.689,18.923 50.598,17.832 50.598,15.927 49.403,14.732 v1(48.006,14.732)
  Bottom Layer w0.203: v1(36.83,49.911) 36.83,49.276 37.084,49.022 40.513,49.022 41.021,48.514 v1(41.021,46.609)
CELL2: pad.1@43.477,11.006 Q13.3 Q14.1 Q18.2 R15.2 R23.1 | length 29.3
  Top Layer w0.203: Q18.2@19.286,5.222 20.051,5.222 v1(20.066,5.207) 20.276,4.997 R23.1@20.701,4.997 ; v1(41.148,7.239) 42.164,8.255 42.164,8.382 ; 45.593,13.589 45.448,13.734 Q14.1@45.448,14.971 46.086,14.971 46.311,15.196 R15.2@46.99,15.196
  Signal Layer 1 w0.203: v1(20.066,5.207) 23.114,5.207 25.262,7.355 29.094,7.355 30.607,5.842 37.973,5.842 39.37,7.239 v1(41.148,7.239)
CELL3: pad.1@10.879,11.006 Q17.3 Q18.1 Q22.2 R23.2 R30.1 | length 17.1
  Top Layer w0.203: R30.1@9.779,15.069 10.204,15.069 10.556,14.717 Q22.2@11.194,14.717 11.176,14.699 11.176,13.97
  Top Layer w0.254: v1(18.288,4.191) 18.557,3.922 Q18.1@19.286,3.922 20.051,3.922 20.276,4.147 R23.2@20.701,4.147
  Signal Layer 1 w0.254: v1(13.716,8.763) 14.986,10.033 16.637,10.033 16.937,9.733 16.937,7.412 16.002,6.477 16.002,4.445 16.51,3.937 18.034,3.937 v1(18.288,4.191)
CELL4: pad.0 Q21.3 Q22.1 R30.2 | length 6.1
  Top Layer w0.203: R30.2@9.779,15.919 9.823,15.875 10.541,15.875 10.683,16.017 Q22.1@11.194,16.017 12.05,16.017 v1(12.065,16.002)
  Bottom Layer w0.203: v1(12.065,16.002) 12.446,15.621 14.986,15.621 15.113,15.748 v1(15.113,16.256)
  other v1: 15.621,16.256 16.129,16.256 15.113,16.764 15.621,16.764 16.129,16.764
CEN1: Q23.3 Q24.G R34.2 | length 6.7
  Top Layer w0.203: R34.2@20.745,10.033 20.745,10.458 v1(20.955,10.668) 20.97,10.683 Q24.G@20.97,11.176 ; Q23.3@21.445,15.24 21.445,14.877 v1(21.463,14.859)
  Signal Layer 1 w0.203: v1(20.955,10.668) 20.554,11.069 20.554,13.624 20.427,13.751 20.427,14.189 21.097,14.859 v1(21.463,14.859)
CEN2: Q19.3 Q20.G R27.2 R29.2 | length 24.3
  Top Layer w0.203: v1(19.177,6.858) 19.177,5.969 19.411,5.735 21.316,5.735 21.608,5.443 Q19.3@22.86,5.443 23.35,5.443 23.622,5.715 23.622,6.462 Q20.G@23.637,6.477 24.638,6.477 24.892,6.731 R27.2@24.892,7.195
  Signal Layer 1 w0.203: v1(8.763,14.986) 9.906,14.986 10.786,14.106 12.163,14.106 13.979,12.29 13.979,11.04 14.559,10.46 16.814,10.46 17.363,9.91 17.363,7.366 17.871,6.858 v1(19.177,6.858)
CEN3: Q15.3 Q16.G R20.2 R21.2 | length 6
  Top Layer w0.254: R21.2@35.096,5.334 35.096,5.671 34.925,5.842 Q15.3@34.925,6.622 34.958,6.589 35.941,6.589 ; Q16.G@36.957,6.589 35.941,6.589 ; R20.2@37.548,5.334 36.322,5.334 35.941,5.715 35.941,6.589
CEN4: Q11.3 Q12.G R13.2 R22.2 | length 8.3
  Top Layer w0.254: R13.2@46.609,35.858 v1(47.161,35.858) 47.371,36.068 Q12.G@47.864,36.068 ; v1(49.022,32.766) 49.004,32.748 Q11.3@49.004,32.131 49.004,31.514 49.149,31.369 R22.2@50.375,31.369
  Bottom Layer w0.254: 47.498,35.814 48.514,35.814 49.022,35.306 v1(49.022,32.766)
CHGG: D7.2 Q2.9 Q4.9 Q6.9 Q8.9 Q26.2 R43.1 | length 51.9
  Top Layer w0.203: Q26.2@6.241,34.275 8.016,34.275 8.292,33.999 v1(8.292,33.782) ; D7.2@8.292,32.893 v1(8.292,33.782) ; R43.1@9.779,35.262 9.324,35.262 9.241,35.179 9.241,34.337 9.017,34.113 9.017,33.909 8.89,33.782 v1(8.292,33.782) ; Q8.9@10.393,27.716 10.393,28.173 v1(10.414,28.194) ; Q2.9@40.365,27.589 40.365,28.046 v1(40.386,28.067)
  Bottom Layer w0.203: v1(8.292,33.782) 8.292,32.602 8.763,32.131 10.145,32.131 10.688,31.588 10.688,29.992 10.414,29.718 v1(10.414,28.194) 22.352,28.194 22.352,31.496 23.241,32.385 31.369,32.385 32.258,31.496 32.258,28.067 v1(40.386,28.067)
  other v1: 34.396,28.046 16.373,28.184
CVIN: C7.2 R37.2 U1.13 | length 8.3
  Top Layer w0.203: U1.13@23.695,12.248 25.71,12.248 26.797,13.335 26.797,14.605 26.806,14.614 26.806,15.748 27.06,16.002 R37.2@27.515,16.002
  Top Layer w0.254: C7.2@22.225,12.402 22.777,12.402 22.931,12.248 U1.13@23.695,12.248
DCTRL: D6.1 Q25.1 R42.1 U1.14 | length 57.5
  Top Layer w0.203: R42.1@4.699,37.167 5.378,37.167 5.461,37.084 D6.1@6.186,37.084 6.858,37.084 7.112,37.338 v1(7.112,37.465) 7.112,39.497 6.843,39.766 Q25.1@6.241,39.766 ; U1.14@23.695,11.598 26.076,11.598 v1(26.924,12.446)
  Signal Layer 1 w0.203: v1(7.112,37.465) 8.021,36.556 8.51,36.556 11.264,33.802 29.071,33.802 32.09,30.783 32.09,23.776 26.924,18.609 v1(26.924,12.446)
DISG: D6.2 Q1.9 Q3.9 Q5.9 Q7.9 Q25.2 R41.1 | length 46.1
  Top Layer w0.203: v1(15.621,33.274) 15.642,33.295 Q7.9@15.642,33.752 ; v1@42.672,33.274 v1(42.693,33.295) Q1.9@42.693,33.752
  Top Layer w0.254: v1@6.223,37.973 v1(6.241,37.991) Q25.2@6.241,38.466 ; D6.2@8.546,37.084 9.398,37.084 9.779,37.465 9.779,38.078 ; v1@9.017,38.1 v1(9.039,38.078) 9.779,38.078 ; R41.1@9.779,38.691 9.779,38.078
  Signal Layer 1 w0.203: v1(15.621,33.274) v1(21.59,33.274)
  Bottom Layer w0.203: v1(9.039,38.078) 9.928,38.078 10.414,37.592 10.414,34.163 11.303,33.274 v1(15.621,33.274) ; v1(21.59,33.274) 32.131,33.274 32.512,32.893 36.703,32.893 ; v1(36.703,33.274) 36.703,32.893 ; v1(42.693,33.295) 42.291,32.893 36.703,32.893
  Bottom Layer w0.254: v1(6.241,37.991) 6.328,38.078 v1(9.039,38.078)
GND: C1.1 C2.1 C3.1 C4.1 C5.1 C6.1 C7.1 D1.K pad.1@10.879,43.604 Q10.2 Q12.S R1.2 R2.2 R3.2 R4.2 R5.2 R6.2 R7.2 R8.2 R9.2 R13.1 R45.1 U1.9 | length 12.8
  Top Layer w0.203: R45.1@9.779,33.826 v1(9.779,34.29) ; C7.1@22.225,13.252 22.225,13.858 22.727,14.359 22.727,14.472 U1.9@23.114,14.859 ; C6.1@22.943,16.002 22.987,15.958 22.987,15.367 23.622,15.367 23.695,15.294 U1.9@23.695,14.848 24.5,14.848 v1(24.511,14.859) ; v1@32.131,7.239 v1(32.139,7.247) C5.1@32.139,8.509 ; C1.1@33.02,11.811 33.02,12.275 v1(32.976,12.319) 33.02,12.363 C2.1@33.02,13.208 ; C4.1@33.064,16.002 C3.1@33.064,14.605 v1(33.655,14.605) ; v1(34.544,48.26) R9.2@34.544,48.851 35.096,48.851 35.321,48.626 Q10.2@35.959,48.626 ; v1@50.038,34.544 v1(50.046,34.552) D1.K@50.927,34.552
  other v1: 33.401,2.54 36.068,4.826 41.148,6.096 44.704,33.528 45.212,33.528 45.72,33.528 44.704,34.036 45.212,34.036 45.72,34.036 44.704,34.544 45.212,34.544 45.72,34.544 46.101,40.894 14.732,44.704 15.24,44.704 15.748,44.704 16.256,44.704 16.764,44.704 17.272,44.704 17.78,44.704 18.288,44.704 18.796,44.704 19.304,44.704 19.812,44.704 20.32,44.704 20.828,44.704 21.336,44.704 14.732,45.212 15.24,45.212 15.748,45.212 16.256,45.212 16.764,45.212 17.272,45.212 17.78,45.212 18.288,45.212 18.796,45.212 19.304,45.212 19.812,45.212 20.32,45.212 20.828,45.212 21.336,45.212 32.512,45.593 33.02,45.593 33.528,45.593 34.036,45.593 34.544,45.593 35.052,45.593 14.732,45.72 15.24,45.72 15.748,45.72 16.256,45.72 16.764,45.72 17.272,45.72 17.78,45.72 18.288,45.72 18.796,45.72 19.304,45.72 19.812,45.72 20.32,45.72 20.828,45.72 21.336,45.72 21.844,45.72 22.352,45.72 22.86,45.72 23.368,45.72 23.876,45.72 24.384,45.72 24.892,45.72 25.4,45.72 32.512,46.101 33.02,46.101 33.528,46.101 34.036,46.101 34.544,46.101 35.052,46.101 14.732,46.228 15.24,46.228 15.748,46.228 16.256,46.228 16.764,46.228 17.272,46.228 17.78,46.228 18.288,46.228 18.796,46.228 19.304,46.228 19.812,46.228 20.32,46.228 20.828,46.228 21.336,46.228 21.844,46.228 22.352,46.228 22.86,46.228 23.368,46.228 23.876,46.228 24.384,46.228 24.892,46.228 25.4,46.228 32.512,46.609 33.02,46.609 33.528,46.609 34.036,46.609 34.544,46.609 35.052,46.609 14.732,46.736 15.24,46.736 15.748,46.736 16.256,46.736 16.764,46.736 17.272,46.736 17.78,46.736 18.288,46.736 18.796,46.736 19.304,46.736 19.812,46.736 20.32,46.736 20.828,46.736 21.336,46.736 21.844,46.736 22.352,46.736 22.86,46.736 23.368,46.736 23.876,46.736 24.384,46.736 24.892,46.736 25.4,46.736 14.732,47.244 15.24,47.244 15.748,47.244 16.256,47.244 16.764,47.244 17.272,47.244 17.78,47.244 18.288,47.244 18.796,47.244 19.304,47.244 19.812,47.244 20.32,47.244 20.828,47.244 21.336,47.244 21.844,47.244 22.352,47.244 22.86,47.244 23.368,47.244 23.876,47.244 24.384,47.244 20.32,47.752 20.828,47.752 21.336,47.752 21.844,47.752 22.352,47.752 22.86,47.752 23.368,47.752 20.32,48.26 20.828,48.26 21.336,48.26 21.844,48.26 22.352,48.26 22.86,48.26 23.368,48.26 20.32,48.768 20.828,48.768 21.336,48.768 21.844,48.768 22.352,48.768 22.86,48.768 23.368,48.768 20.32,49.276 20.828,49.276 21.336,49.276 21.844,49.276 22.352,49.276 22.86,49.276 23.368,49.276 20.32,49.784 20.828,49.784 21.336,49.784 21.844,49.784 22.352,49.784 22.86,49.784 23.368,49.784 20.32,50.292 20.828,50.292 21.336,50.292 21.844,50.292 22.352,50.292 22.86,50.292 23.368,50.292
IS: Q1.1 Q1.2 Q1.3 Q1.4 Q3.1 Q3.2 Q3.3 Q3.4 Q5.1 Q5.2 Q5.3 Q5.4 Q7.1 Q7.2 Q7.3 Q7.4 Q25.3 R1.1 R2.1 R3.1 R4.1 R5.1 R6.1 R7.1 R8.1 R37.1 R41.2 R42.2 | length 37.1
  Top Layer w0.203: R42.2@4.699,38.017 v1(4.699,38.608) ; v1(7.747,39.116) Q25.3@8.491,39.116 8.491,39.479 8.553,39.541 R41.2@9.779,39.541 12.021,39.541 v1@12.065,39.497 ; v1@11.855,39.033 v1@11.938,39.116 ; v1(28.067,15.24) 28.365,15.538 R37.1@28.365,16.002
  Signal Layer 1 w0.203: v1(28.067,15.24) 28.067,18.617 32.893,23.443 32.893,31.115 29.464,34.544 v1(29.464,39.37)
  Bottom Layer w0.203: v1(4.699,38.608) 6.35,38.608 6.858,39.116 v1(7.747,39.116)
  other v1: 32.766,33.782 33.274,33.782 33.782,33.782 34.29,33.782 34.798,33.782 35.306,33.782 38.735,33.782 39.243,33.782 39.751,33.782 40.259,33.782 40.767,33.782 41.275,33.782 32.766,34.29 33.274,34.29 33.782,34.29 34.29,34.29 34.798,34.29 35.306,34.29 38.735,34.29 39.243,34.29 39.751,34.29 40.259,34.29 40.767,34.29 41.275,34.29 17.399,34.798 17.907,34.798 18.415,34.798 18.923,34.798 19.431,34.798 19.939,34.798 20.447,34.798 23.241,34.798 23.749,34.798 24.257,34.798 24.765,34.798 32.766,34.798 33.274,34.798 33.782,34.798 34.29,34.798 34.798,34.798 35.306,34.798 35.814,34.798 38.735,34.798 39.243,34.798 39.751,34.798 40.259,34.798 40.767,34.798 41.275,34.798 41.783,34.798 11.938,34.925 12.446,34.925 12.954,34.925 13.462,34.925 13.97,34.925 14.478,34.925 17.399,35.306 17.907,35.306 18.415,35.306 18.923,35.306 19.431,35.306 19.939,35.306 20.447,35.306 23.241,35.306 23.749,35.306 24.257,35.306 24.765,35.306 32.766,35.306 33.274,35.306 33.782,35.306 34.29,35.306 34.798,35.306 35.306,35.306 35.814,35.306 38.735,35.306 39.243,35.306 39.751,35.306 40.259,35.306 40.767,35.306 41.275,35.306 41.783,35.306 11.43,35.433 11.938,35.433 12.446,35.433 12.954,35.433 13.462,35.433 13.97,35.433 14.478,35.433 17.399,35.814 17.907,35.814 18.415,35.814 18.923,35.814 19.431,35.814 19.939,35.814 20.447,35.814 23.241,35.814 23.749,35.814 24.257,35.814 24.765,35.814 32.766,35.814 33.274,35.814 33.782,35.814 34.29,35.814 34.798,35.814 35.306,35.814 35.814,35.814 38.735,35.814 39.243,35.814 39.751,35.814 40.259,35.814 40.767,35.814 41.275,35.814 41.783,35.814 11.43,35.941 11.938,35.941 12.446,35.941 12.954,35.941 13.462,35.941 13.97,35.941 14.478,35.941 17.399,36.322 17.907,36.322 18.415,36.322 18.923,36.322 19.431,36.322 19.939,36.322 20.447,36.322 23.241,36.322 23.749,36.322 24.257,36.322 24.765,36.322 32.766,36.322 33.274,36.322 33.782,36.322 34.29,36.322 34.798,36.322 35.306,36.322 35.814,36.322 38.735,36.322 39.243,36.322 39.751,36.322 40.259,36.322 40.767,36.322 41.275,36.322 41.783,36.322 11.43,36.449 11.938,36.449 12.446,36.449 12.954,36.449 13.462,36.449 13.97,36.449 14.478,36.449 17.399,36.83 17.907,36.83 18.415,36.83 18.923,36.83 19.431,36.83 19.939,36.83 20.447,36.83 23.241,36.83 23.749,36.83 24.257,36.83 24.765,36.83 32.766,36.83 33.274,36.83 33.782,36.83 34.29,36.83 34.798,36.83 35.306,36.83 35.814,36.83 38.735,36.83 39.243,36.83 39.751,36.83 40.259,36.83 40.767,36.83 41.275,36.83 41.783,36.83 11.43,36.957 11.938,36.957 12.446,36.957 12.954,36.957 13.462,36.957 13.97,36.957 14.478,36.957 17.399,37.338 17.907,37.338 18.415,37.338 18.923,37.338 19.431,37.338 19.939,37.338 20.447,37.338 23.241,37.338 23.749,37.338 24.257,37.338 24.765,37.338 32.766,37.338 33.274,37.338 33.782,37.338 34.29,37.338 34.798,37.338 35.306,37.338 35.814,37.338 38.735,37.338 39.243,37.338 39.751,37.338 40.259,37.338 40.767,37.338 41.275,37.338 41.783,37.338 11.43,37.465 11.938,37.465 12.446,37.465 12.954,37.465 13.462,37.465 13.97,37.465 14.478,37.465 23.241,37.846 23.749,37.846 24.257,37.846 24.765,37.846 32.766,37.846 33.274,37.846 33.782,37.846 34.29,37.846 34.798,37.846 35.306,37.846 35.814,37.846 38.735,37.846 39.243,37.846 39.751,37.846 40.259,37.846 40.767,37.846 41.275,37.846 41.783,37.846 11.43,37.973 11.938,37.973 12.446,37.973 12.954,37.973 13.462,37.973 13.97,37.973 14.478,37.973 15.113,37.973 15.621,37.973 16.129,37.973 16.637,37.973 17.145,37.973 17.653,37.973 18.161,37.973 32.766,38.354 33.274,38.354 33.782,38.354 34.29,38.354 34.798,38.354 35.306,38.354 35.814,38.354 38.735,38.354 39.243,38.354 39.751,38.354 40.259,38.354 40.767,38.354 41.275,38.354 41.783,38.354 11.43,38.481 11.938,38.481 12.446,38.481 12.954,38.481 13.462,38.481 13.97,38.481 14.478,38.481 15.113,38.481 15.621,38.481 16.129,38.481 16.637,38.481 17.145,38.481 17.653,38.481 18.161,38.481 11.43,38.989 11.938,38.989 12.446,38.989 12.954,38.989 13.462,38.989 13.97,38.989 14.478,38.989 15.113,38.989 15.621,38.989 16.129,38.989 16.637,38.989 17.145,38.989 17.653,38.989 18.161,38.989 11.43,39.497 11.938,39.497 12.446,39.497 12.954,39.497 13.462,39.497 13.97,39.497 14.478,39.497 15.113,39.497 15.621,39.497 16.129,39.497 16.637,39.497 17.145,39.497 17.653,39.497 18.161,39.497
NetD1_A: D1.A R22.1 | length 1.8
  Top Layer w0.254: D1.A@50.927,33.012 50.927,32.385 51.225,32.087 R22.1@51.225,31.369
NetD2_A: D2.A R21.1 | length 1.7
  Top Layer w0.254: R21.1@34.246,5.334 34.246,4.616 34.417,4.445 34.417,3.691 D2.A@34.409,3.683
NetD3_A: D3.A R29.1 | length 1.7
  Top Layer w0.203: D3.A@6.612,15.748 7.493,15.748 7.664,15.919 R29.1@8.255,15.919
NetD4_2: D4.2 R36.1 | length 6.1
  Top Layer w0.254: R36.1@28.023,8.509 28.023,7.664 28.194,7.493 30.226,7.493 31.967,5.752 D4.2@32.512,5.752
NetD5_A: D5.A R40.1 | length 2
  Top Layer w0.254: D5.A@5.088,31.369 D5.A@4.961,31.496 5.969,31.496 6.096,31.369 R40.1@6.687,31.369
NetQ1_5: Q1.5 Q1.6 Q1.7 Q1.8 Q2.5 Q2.6 Q2.7 Q2.8 Q3.5 Q3.6 Q3.7 Q3.8 Q4.5 Q4.6 Q4.7 Q4.8
NetQ5_5: Q5.5 Q5.6 Q5.7 Q5.8 Q6.5 Q6.6 Q6.7 Q6.8 Q7.5 Q7.6 Q7.7 Q7.8 Q8.5 Q8.6 Q8.7 Q8.8
  other v1: 11.938,29.845 12.446,29.845 12.954,29.845 13.462,29.845 13.97,29.845 14.478,29.845 14.986,29.845 16.637,29.845 17.145,29.845 17.653,29.845 18.161,29.845 18.669,29.845 19.177,29.845 19.685,29.845 20.193,29.845 20.701,29.845 21.209,29.845 21.717,29.845 11.43,30.353 11.938,30.353 12.446,30.353 12.954,30.353 13.462,30.353 13.97,30.353 14.478,30.353 14.986,30.353 16.637,30.353 17.145,30.353 17.653,30.353 18.161,30.353 18.669,30.353 19.177,30.353 19.685,30.353 20.193,30.353 20.701,30.353 21.209,30.353 21.717,30.353 11.43,30.861 11.938,30.861 12.446,30.861 12.954,30.861 13.462,30.861 13.97,30.861 14.478,30.861 14.986,30.861 16.637,30.861 16.637,30.861 17.145,30.861 17.653,30.861 18.161,30.861 18.669,30.861 19.177,30.861 19.685,30.861 20.193,30.861 20.701,30.861 21.209,30.861 21.717,30.861 11.43,31.369 11.938,31.369 12.446,31.369 12.954,31.369 13.462,31.369 13.97,31.369 14.478,31.369 14.986,31.369 16.637,31.369 17.145,31.369 17.653,31.369 18.161,31.369 18.669,31.369 19.177,31.369 19.685,31.369 20.193,31.369 20.701,31.369 21.209,31.369 21.717,31.369 11.43,31.877 11.938,31.877 12.446,31.877 12.954,31.877 13.462,31.877 13.97,31.877 14.478,31.877 14.986,31.877 16.637,31.877 17.145,31.877 17.653,31.877 18.161,31.877 18.669,31.877 19.177,31.877 19.685,31.877 20.193,31.877 20.701,31.877 21.209,31.877 21.717,31.877
NetQ9_1: Q9.1 Q9.4 R10.1
  other v1: 37.592,44.069 37.592,44.577 38.1,44.577 37.592,45.085 39.751,47.752 40.259,47.752 39.751,48.26 40.259,48.26
NetQ9_2: Q9.2 Q9.5 Q10.3 R10.2 | length 6.6
  Top Layer w0.203: Q10.3@38.209,49.276 38.209,48.913 38.735,48.387 v1(38.735,47.752) Q9.5@38.735,47.229 ; Q9.2@38.735,45.227 v1(38.735,44.831) 39.16,44.406 R10.2@39.16,43.942
  Signal Layer 1 w0.203: v1(38.735,44.831) v1(38.735,47.752)
NetQ11_1: Q11.1 R12.2 | length 1.5
  Top Layer w0.254: R12.2@45.339,32.556 45.891,32.556 46.116,32.781 Q11.1@46.754,32.781
NetQ12_3: Q12.D R11.1
NetQ13_1: Q13.1 Q13.4 R16.2 | length 0.8
  Top Layer w0.203: R16.2@36.703,15.538 37.255,15.538 v1(37.465,15.748)
  other v1: 40.132,12.827 40.132,13.335 40.132,13.843 37.465,16.383 37.973,16.383
NetQ13_2: Q13.2 Q13.5 Q14.3 R16.1 | length 8
  Top Layer w0.203: R16.1@36.703,14.688 37.294,14.688 v1(37.719,15.113) Q13.5@38.115,15.113 ; Q13.2@40.117,15.113 v1(40.513,15.113) ; v1(43.18,15.113) 43.198,15.131 Q14.3@43.198,15.621
  Signal Layer 1 w0.203: v1(37.719,15.113) v1(40.513,15.113) v1(43.18,15.113)
NetQ15_1: Q15.1 R19.2 | length 1.5
  Top Layer w0.254: R19.2@35.35,10.287 35.35,9.735 35.575,9.51 Q15.1@35.575,8.872
NetQ16_3: Q16.D R18.1
NetQ17_1: Q17.1 Q17.4 R24.2
  other v1: 15.113,4.445 14.732,4.826 14.351,5.207 13.843,5.334 16.383,8.001 15.875,8.382 16.383,8.763 16.383,9.398
NetQ17_2: Q17.2 Q17.5 Q18.3 R24.1 | length 7.5
  Top Layer w0.254: R24.1@14.688,9.144 14.688,8.553 14.986,8.255 Q17.2@14.986,7.859 ; Q17.5@14.986,5.857 v1(14.986,5.461) 15.875,4.572 Q18.3@17.036,4.572
  Bottom Layer w0.254: v1(14.732,8.636) 14.732,5.715 v1(14.986,5.461)
NetQ19_1: Q19.1 R26.2 | length 17.8
  Top Layer w0.203: Q19.1@22.21,3.193 v1(22.842,3.193) v1@22.86,3.175 ; R26.2@33.064,10.287 33.064,9.608 33.274,9.398 v1(33.274,7.239)
  Bottom Layer w0.203: v1(22.842,3.193) 22.842,5.316 24.881,7.355 30.999,7.355 31.75,6.604 32.639,6.604 v1(33.274,7.239)
NetQ20_3: Q20.D R28.1
NetQ21_1: Q21.1 Q21.4 R31.2
  other v1: 16.891,14.097 17.399,14.097 17.907,14.097 17.145,14.605 13.716,16.256 14.224,16.256 13.716,16.764 14.224,16.764
NetQ21_2: Q21.2 Q21.5 Q22.3 R31.1 | length 6.7
  Top Layer w0.203: v1(13.462,14.986) 13.462,15.349 Q22.3@13.444,15.367 13.916,15.367 14.17,15.113 Q21.5@14.366,15.113 ; Q21.2@16.368,15.113 16.764,15.113 17.189,15.538 R31.1@17.78,15.538
  Bottom Layer w0.203: v1(13.462,14.986) 16.637,14.986 v1(17.018,15.367)
NetQ23_1: Q23.1 R33.2 | length 13.5
  Top Layer w0.203: Q23.1@19.195,15.89 19.924,15.89 20.193,15.621 v1(20.193,14.732) ; v1(29.21,16.002) R33.2@29.928,16.002
  Bottom Layer w0.203: v1(20.193,14.732) 20.193,16.256 20.32,16.383 28.829,16.383 v1(29.21,16.002)